# Altium PCB Single_channel_Mobo.PcbDoc
Units mm, origin at the board's own origin, x right, y up, seen from the top; angles counter-clockwise.
Board outline 82.3 x 56.04 mm, 4 copper layers (Component Side, Ground Plane, Power Plane, Solder Side), stack 1.704 mm thick; 45 components, 59 nets, 331 pads, 69 vias.
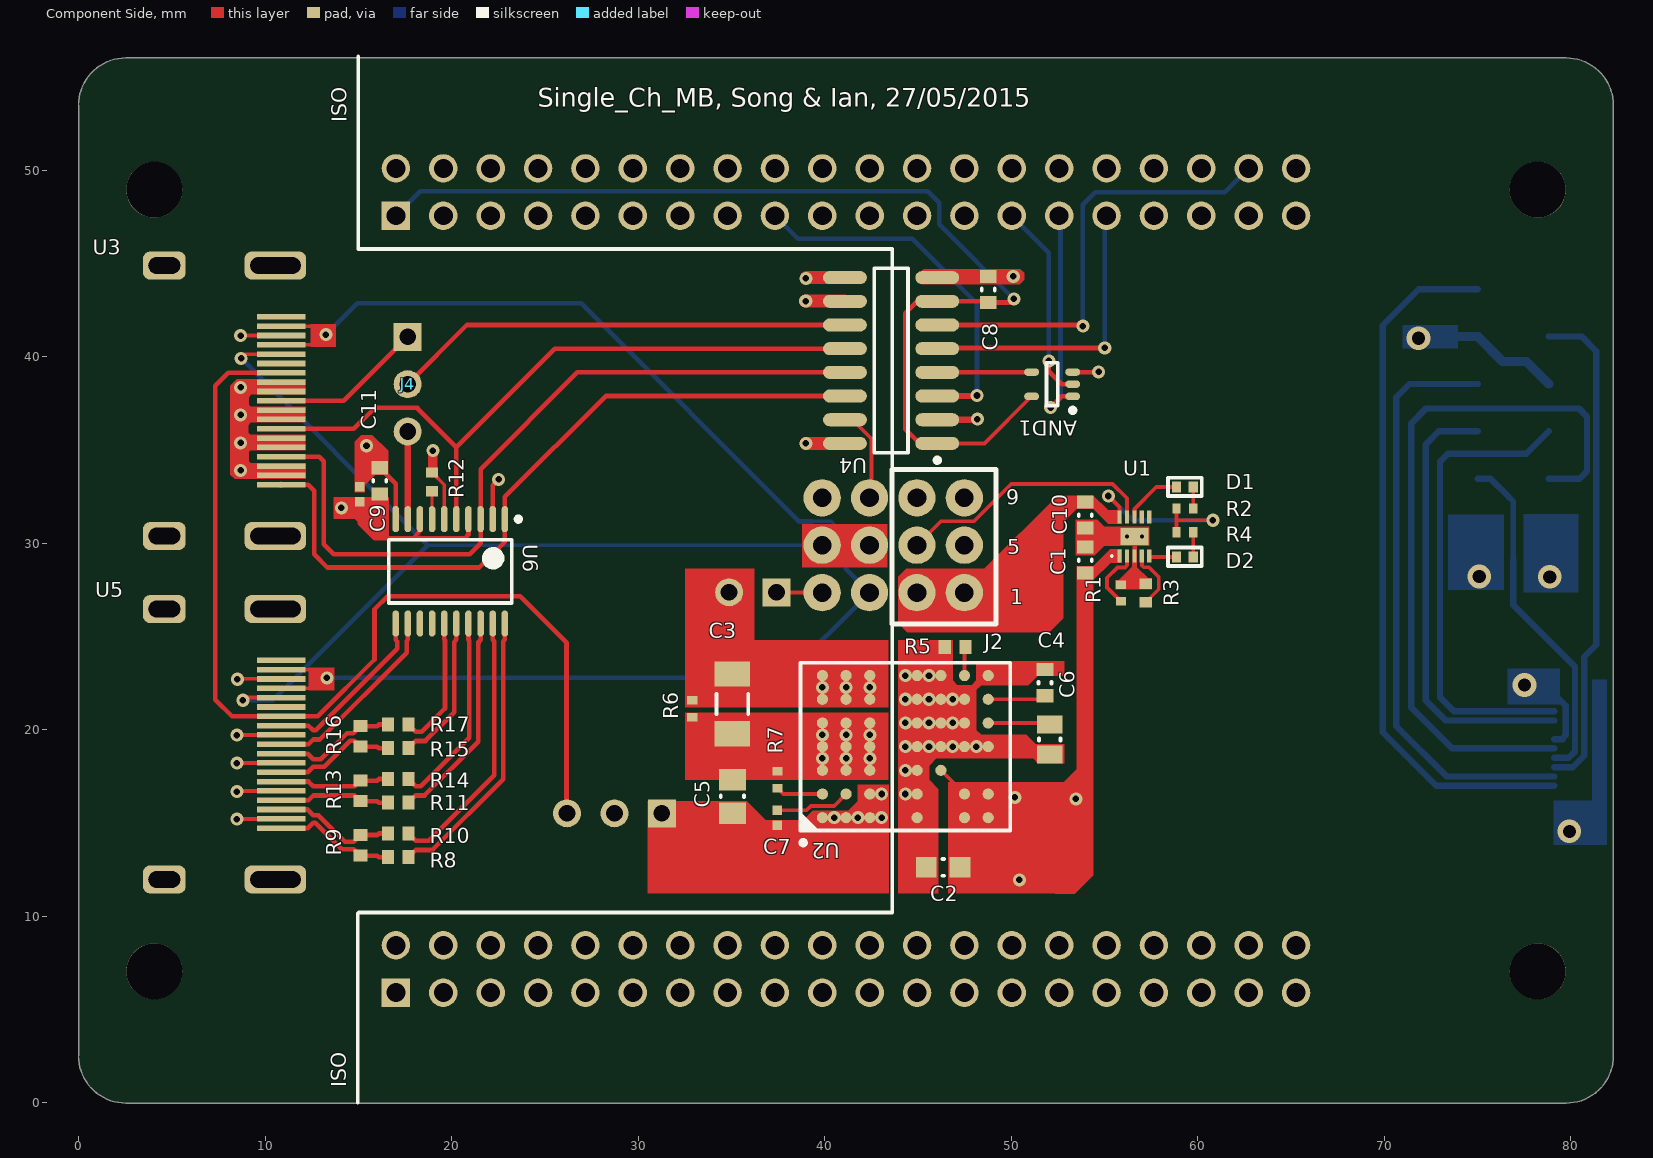
[diagram p0: Component Side view]
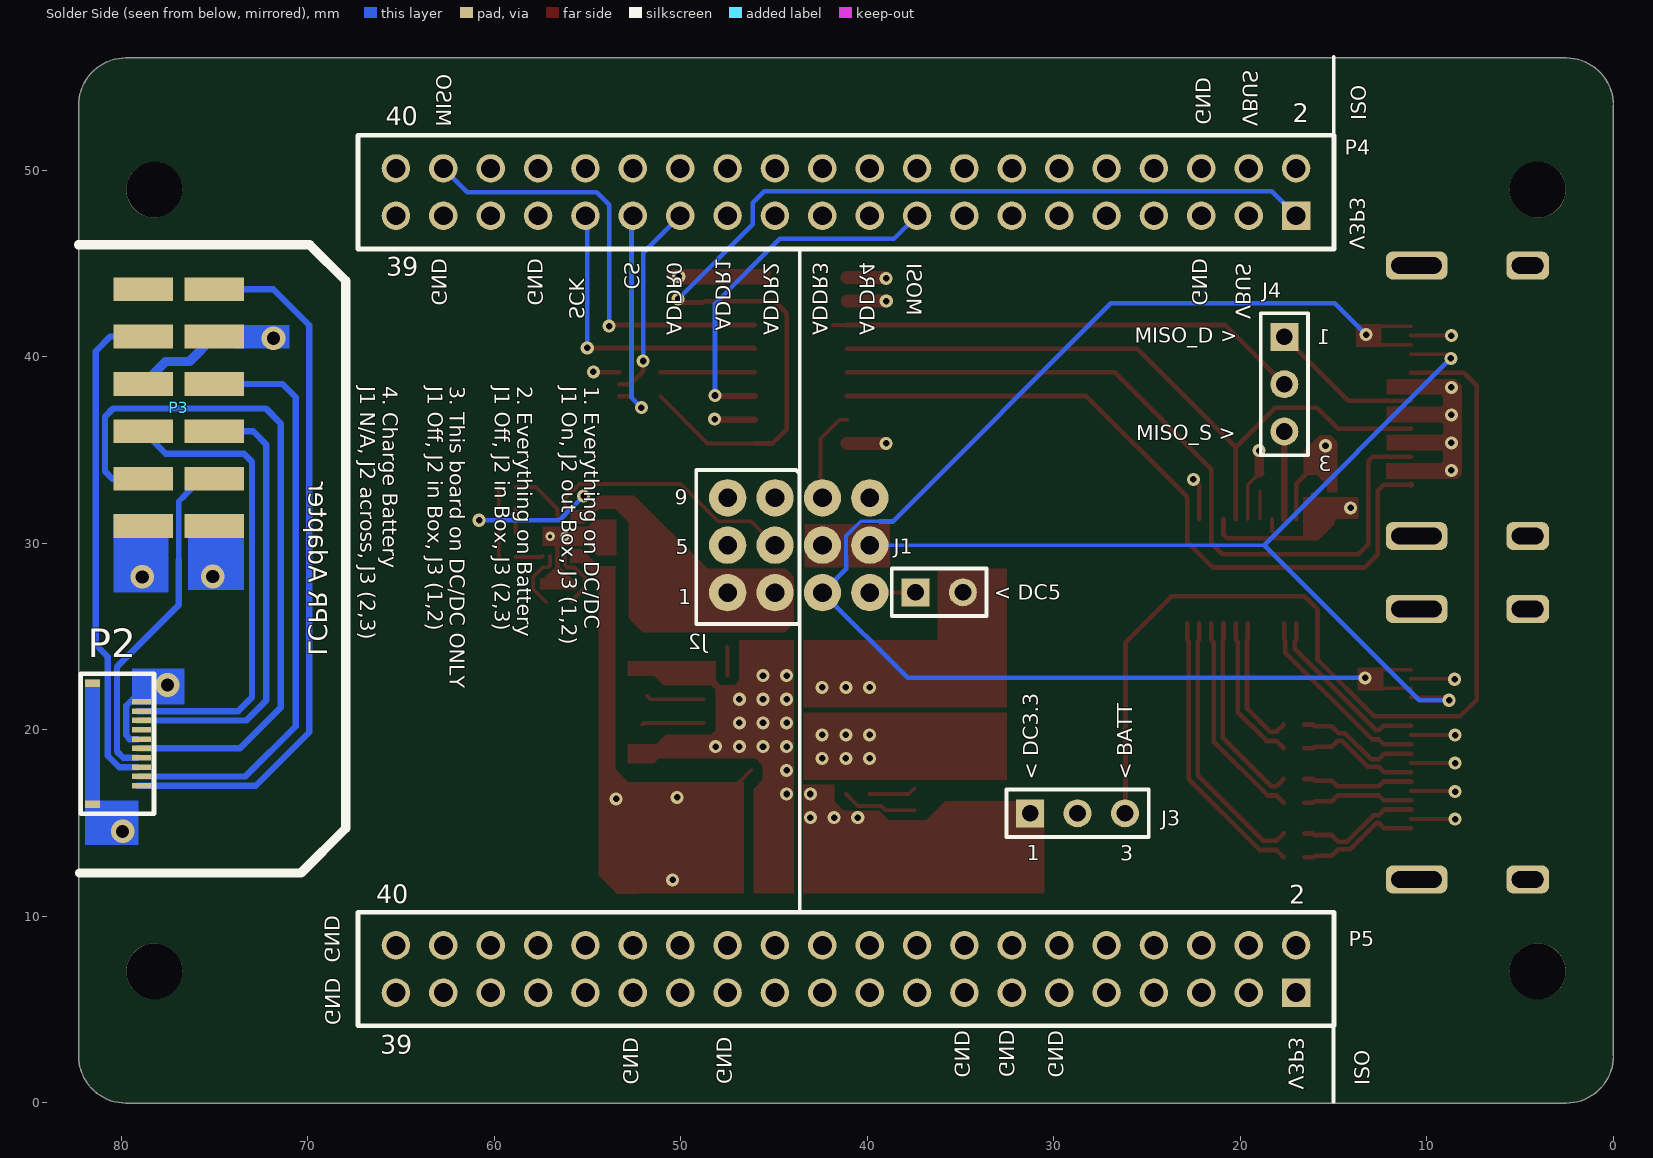
[diagram p1: Solder Side view, seen from below]
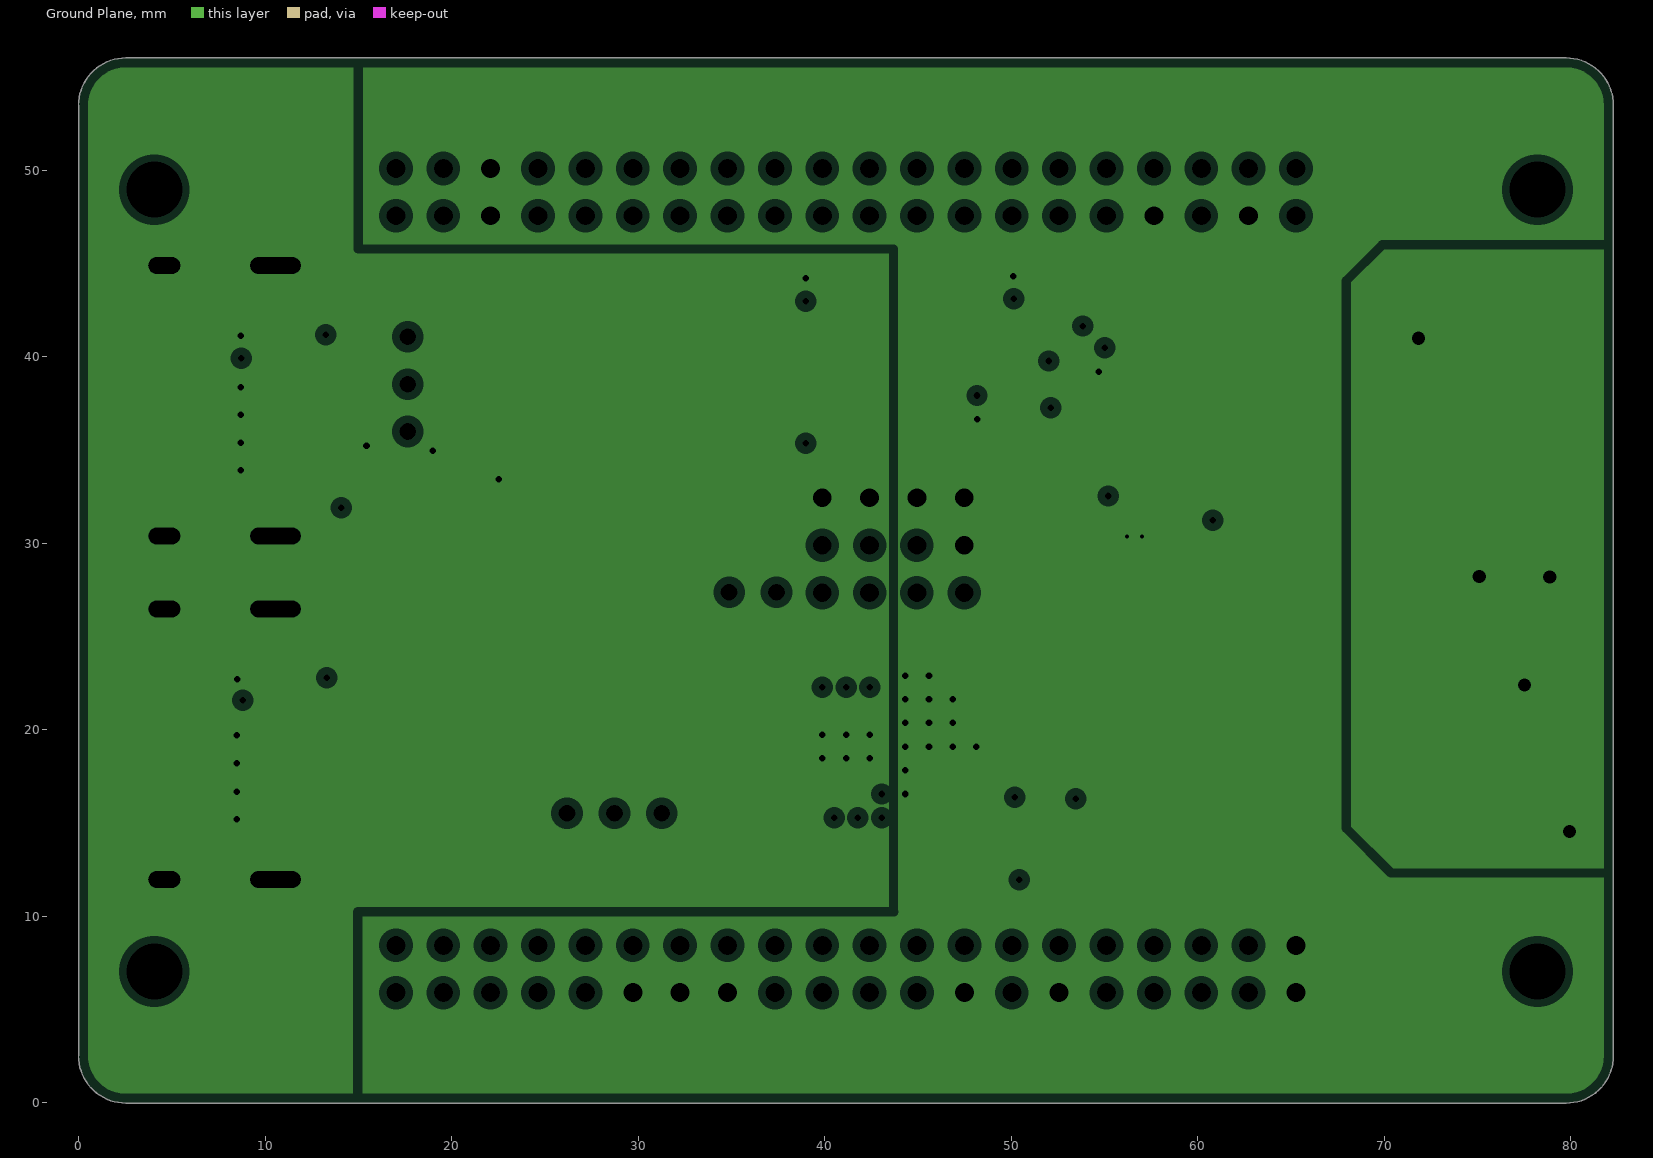
[diagram p2: Ground Plane, clearances drawn from the general rule]
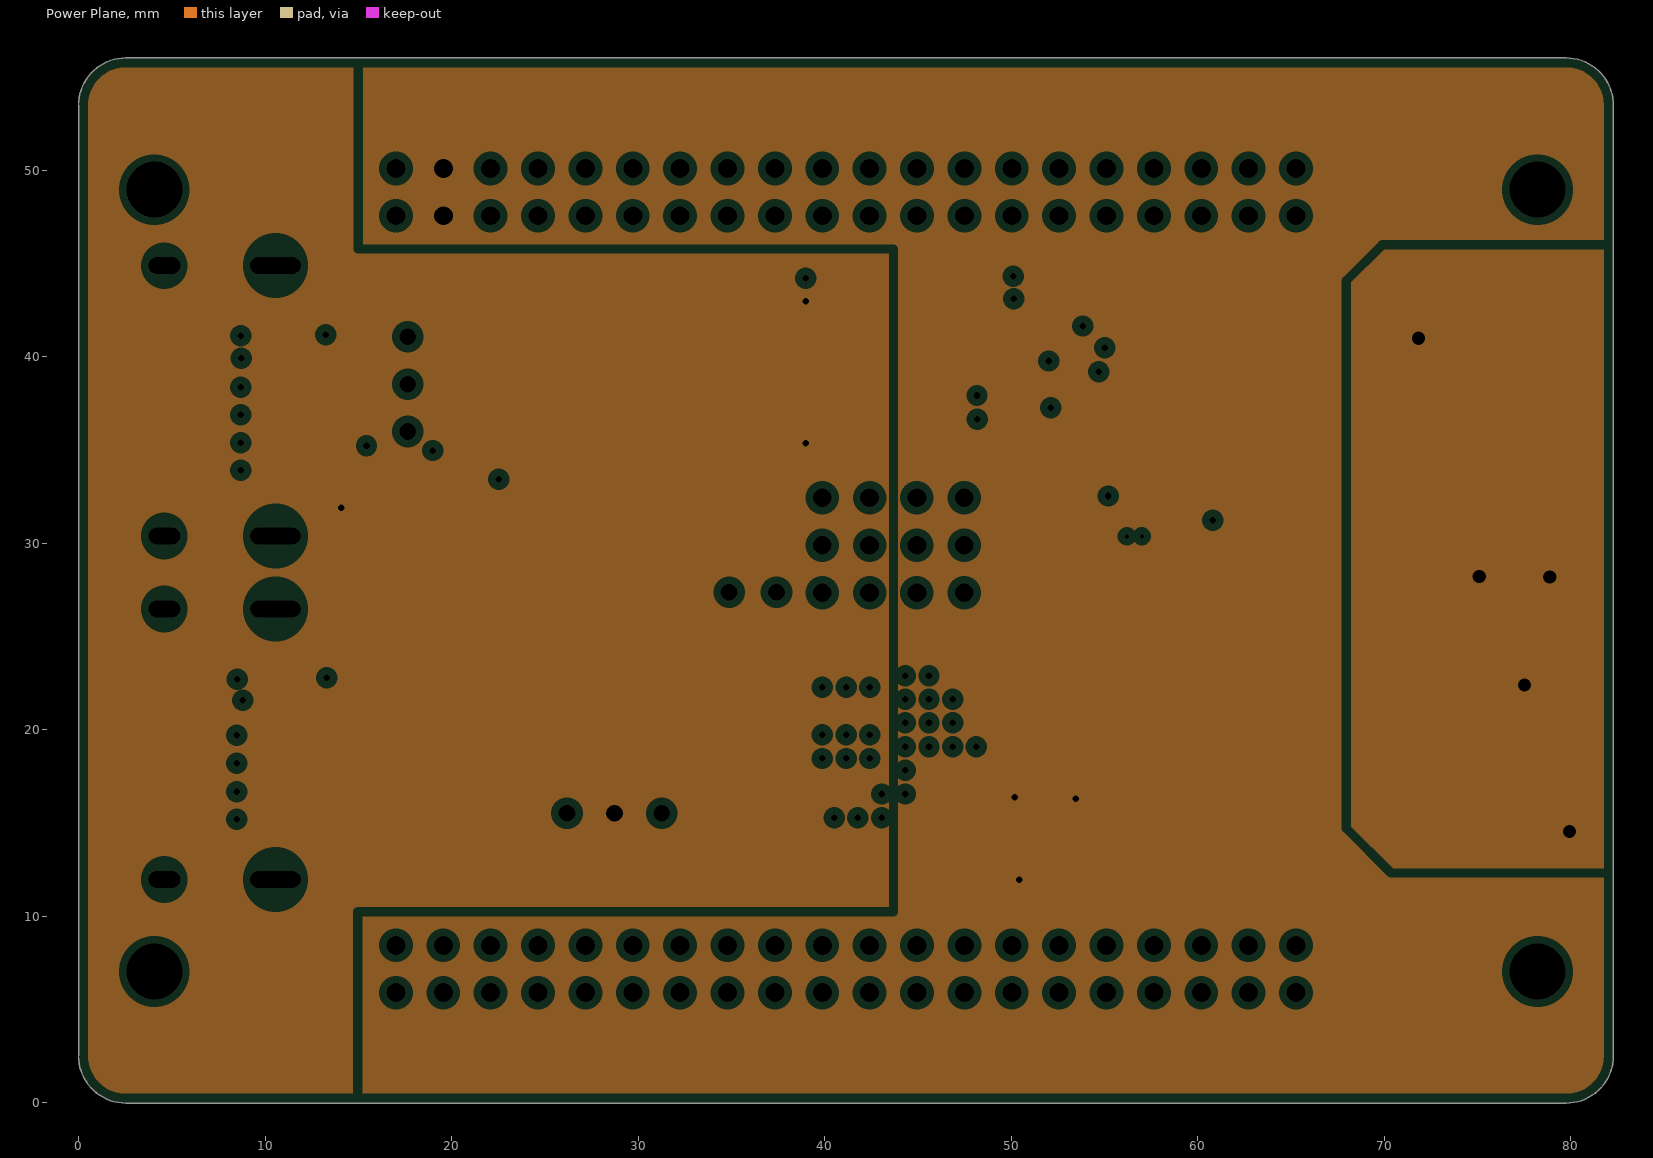
[diagram p3: Power Plane, clearances drawn from the general rule]

## Layer stack, top to bottom
Top Solder: solder mask 0.0102, Solder Resist, Dk 3.5
Component Side: signal copper 0.035
Dielectric 1: prepreg 0.2, PP7628, Dk 4.6
Ground Plane: plane copper 0.017, net (Multiple Nets)
Dielectric 3: core 1.2, KB-A, Dk 4.58
Power Plane: plane copper 0.017, net (Multiple Nets)
Dielectric 4: prepreg 0.2, PP7628, Dk 4.6
Solder Side: signal copper 0.035
Bottom Solder: solder mask 0.0102, Solder Resist, Dk 3.5

## Board outline
0,2.526 ccw(c2.54,2.526) 2.54,-0.014 79.756,-0.014 ccw(c79.756,2.526) 82.296,2.526 82.296,53.484 ccw(c79.756,53.484) 79.756,56.024 2.54,56.024 ccw(c2.54,53.484) 0,53.484

## Design rules (kind name [scope] priority, off if disabled: settings)
Clearance Clearance-xPP-xTP-xTT [All] p1: gap=0.15
ComponentClearance [All] p1: gap=0.25 collisioncheckmode=3 verticalgap=0.25 showdistances=FALSE
DiffPairsRouting DiffPair_LVDS_100DiffPairsRouting [InDifferentialPairClass('LVDS_100')] p1: maxlimit=0.762 minlimit=0.15 mostfreqgap=0.152 toplayer_minwidth=0.15 toplayer_maxwidth=0.6 toplayer_prefwidth=0.25 bottomlayer_minwidth=0.15 bottomlayer_maxwidth=0.6 bottomlayer_prefwidth=0.25 maxuncoupledlength=12.7
Height [All] p1: minheight=0 maxheight=25 prefheight=12.5
HoleSize HoleSize-PTH [All] p1: absolutevalues=TRUE maxlimit=6.3 minlimit=0.3 maxpercent=80.000 minpercent=20.000
HoleToHoleClearance [All] p1: gap=0.15 allowstackedmicrovias=TRUE
MatchedLengths DiffPair_LVDS_100MatchedLengths [InDifferentialPairClass('LVDS_100')] p1: tolerance=12 checknetsindiffpair=TRUE checkdiffpairvsdiffpair=FALSE checkothers=FALSE
MaxMinImpedance DiffPair_LVDS_100 [InDifferentialPairClass('LVDS_100')] p1: minimum=45.00 maximum=50.00
MinimumAnnularRing "Minimum IAR  >0.45mm" [((ObjectKind = 'Pad') OR (ObjectKind = 'Via')) And (Layer = 'MultiLayer') And (HoleDiameter > AsMM(0.45))] p1 off: minimumring=0.25 // minimum inner annular ring for pads > 0.45mm finished hole size
MinimumAnnularRing "Minimum IAR <=0.45mm" [((ObjectKind = 'Pad') OR (ObjectKind = 'Via')) And (Layer = 'MultiLayer') And (HoleDiameter <= AsMM(0.45))] p2: minimumring=0.125 // minimum inner annular ring for pads <= 0.45mm finished hole size
MinimumSolderMaskSliver [All] p1: minsoldermaskwidth=0.1
PlaneClearance PlaneClearance-IPI [All] p1: clearance=0.4
PlaneConnect [All] p1: planeconnectstyle=Relief reliefexpansion=0.4 reliefentries=4 reliefconductorwidth=0.2 reliefairgap=0.2
PolygonConnect [All vs IsNamedPolygon('VCC_1.5_L04_P002')] p1: connectstyle=Relief reliefconductorwidth=0.254 reliefentries=4 polygonreliefangle="90 Angle" airgapwidth=0.254
PolygonConnect PolygonConnect-xTW [All] p2: connectstyle=Relief reliefconductorwidth=0.2 reliefentries=4 polygonreliefangle="90 Angle" airgapwidth=0.254
RoutingCorners [All] p1: cornerstyle=45-Degree minsetback=2.5 maxsetback=2.5
RoutingVias [All] p1: holewidth=0.25 width=0.6 viastyle="Through Hole" minholewidth=0.35 minwidth=0.6 maxholewidth=0.5 maxwidth=1 // finishet hole size <= 0.45mm
SilkToSilkClearance [All] p1: silktosilkclearance=0.2
SilkToSolderMaskClearance SilkscreenOverComponentPads [IsPad] p1: minsilkscreentomaskgap=0.2 clearancetoexposedcopper=TRUE
SolderMaskExpansion [All] p1: expansion=0.1
Width DiffPair_LVDS_1 [InDifferentialPairClass('LVDS_100')] p1: maxlimit=0.262 minlimit=0.262 preferedwidth=0.262 impedancedriven=TRUE minimp=50.000000 maximp=50.000000 favimp=50.000000
Width SPI [InNetClass('SPI_SingleEnd')] p2: maxlimit=0.262 minlimit=0.019 preferedwidth=0.262 impedancedriven=TRUE minimp=50.000000 maximp=100.000000 favimp=50.000000
Width Width-xTW [All] p3: maxlimit=1.524 minlimit=0.15 preferedwidth=0.25
19 further rules are at their usual default settings.

## Classes and differential pairs
differential pair class LVDS_100: CLK CS I_CLK I_CS I_MOSI MISO MOSI
differential pair I_MOSI: +I_MOSI_P -I_MOSI_N
differential pair I_CS: +I_CS_P -I_CS_N
differential pair I_CLK: +I_CLK_P -I_CLK_N
differential pair CLK: +CLK_P -CLK_N
differential pair CS: +CS_P -CS_N
differential pair MISO: +MISO_P -MISO_N
differential pair MOSI: +MOSI_P -MOSI_N

## Components (designator, comment, footprint, x,y, rotation, side; value= is the part's Value field where it differs from the comment)
AND1 "AND_gate" "TSOP 5 AND" 52.203,38.53 r180 top
C1 "CAP 1uF 25V 0603(1608)" CAPC0603(1608)100_L 53.974,29.1 r270 top
C2 "CAP 2.2uF 25V 0603(1608)" CAPC0603(1608)100_M 46.361,12.622 r0 top
C3 "CAP 47uF 16V 1206(3216)" CAPC1206(3216)190_M 35.058,21.385 r90 top
C4 "CAP 1uF 25V 0603(1608)" CAPC0603(1608)100_L 51.822,22.528 r90 top
C5 "CAP 10uF 25V 0805(2012)" CAPC0805(2012)145_N 35.058,16.432 r270 top
C6 "CAP 4.7uF 25V 0805(2012)" CAPC0805(2012)145_L 52.076,19.48 r270 top
C7 "CAP 10nF 25V 0402(1005)" CAPC0402(1005)60_L 37.471,15.289 r90 top
C8 "CAP 1uF 25V 0603(1608)" CAPC0603(1608)100_L 48.774,43.61 r270 top
C9 "CAP 1uF 25V 0603(1608)" CAPC0603(1608)100_L 16.148,33.35 r270 top
C10 "CAP 1uF 25V 0603(1608)" CAPC0603(1608)100_L 53.974,31.513 r270 top
C11 "CAP 10nF 25V 0402(1005)" CAPC0402(1005)60_L 15.073,32.625 r270 top
D1 "LED2" "LED 0610" 59.317,33.012 r180 top
D2 "LED2" "LED 0610" 59.317,29.262 r180 top
J1 "Header 2" HDR1X2 37.423,27.375 r180 bottom
J2 "4x3 pin jumper header" "4x3 pin jumper header" 47.492,32.437 r180 top
J3 "Header 3" HDR1X3 31.273,15.525 r180 bottom
J4 "Header 3" HDR1X3 17.647,41.07 r270 top
P2 "10 pin FFC/FPC connector" "10 FFC/FPC connector 0.5mm pitch" 78.943,19.253 r270 bottom
P3 "12 pin dual row SMD header" TSM-106-01-S-DH 78.823,43.625 r90 bottom
P4 "Header 20X2" SSW-120-03-G-D 41.148,48.833 r180 bottom locked
P5 "Header 20X2" SSW-120-03-G-D 41.148,7.177 r180 bottom locked
R1 "5K6 5% 0402(1005)" RESC0402(1005)_L 55.892,27.337 r90 top
R2 "4K7 5% 0402(1005)" RESC0402(1005)_L 59.317,31.862 r180 top
R3 "2K 5% 0402(1005)" RESC0402(1005)_N 57.217,27.337 r90 top
R4 "4K7 5% 0402(1005)" RESC0402(1005)_L 59.317,30.587 r0 top
R5 "6K8 5% 0402(1005)" RESC0402(1005)_M 46.996,24.433 r180 top
R6 "1K 5% 0402(1005)" RESC0402(1005)_L 32.899,21.131 r90 top
R7 "300K 1% 0402(1005)" RESC0402(1005)_L 37.471,17.321 r90 top
R8 "165R 1% 0402(1005)" RESC0402(1005)_M 17.139,13.172 r0 top
R9 "140R 1% 0402(1005)" RESC0402(1005)_M 15.107,13.807 r270 top
R10 "165R 1% 0402(1005)" RESC0402(1005)_M 17.139,14.442 r0 top
R11 "165R 1% 0402(1005)" RESC0402(1005)_M 17.139,16.093 r0 top
R12 "10K 5% 0402(1005)" RESC0402(1005)_N 18.958,33.29 r270 top
R13 "140R 1% 0402(1005)" RESC0402(1005)_M 15.107,16.728 r270 top
R14 "165R 1% 0402(1005)" RESC0402(1005)_M 17.139,17.363 r0 top
R15 "165R 1% 0402(1005)" RESC0402(1005)_M 17.139,19.014 r0 top
R16 "140R 1% 0402(1005)" RESC0402(1005)_M 15.107,19.649 r270 top
R17 "165R 1% 0402(1005)" RESC0402(1005)_M 17.139,20.284 r0 top
U1 "BQ24040DSQT" DSQ10-1500X900TP 56.613,30.37 r90 top
U2 "LTM8048EY#PBF" LT-BGA-45-11250X9000X4920 44.329,19.099 r90 top
U3 "MOLEX 0471510001" "MOLEX 0471510001" 1.01,37.641 r270 top
U4 "Si8641BC-B-IS1" SLAB-SOIC-16-NB_M 43.567,39.8 r180 top
U5 "MOLEX 0471510001" "MOLEX 0471510001" 1.01,19.226 r270 top
U6 "SN65LVDT41QPWREP" PW20_L 19.933,28.497 r270 top

## Footprints (in the part's own frame and the unit in brackets; to place one, negate y for a bottom-side part, rotate by r counter-clockwise, add the part's x,y. Pads: shape width x height; smd on the part's side, far side on the other; paste and mask are expansions set on the pad)
"4x3 pin jumper header" [mm]
  round 2 hole 1: 1(0,5.08) 2(2.54,5.08) 3(5.08,5.08) 4(7.62,5.08) 5(0,2.54) 6(2.54,2.54) 7(5.08,2.54) 8(7.62,2.54) 9(0,0) 10(2.54,0) 11(5.08,0) 12(7.62,0)
  silkscreen extent -1.7,-1.52 3.88,6.76
"10 FFC/FPC connector 0.5mm pitch" [mm] "HIROSE(HRS)  FH34SRJ-10S-0.5SH(50)  CONNECTOR, FFC/FPC, RCPT, 10POS, 1ROW"
  rect 0.4x0.8 smd: 0(-3.25,-2.6) 0(3.25,-2.6)
  rect 0.3x1 smd: 1(2.25,0.02) 2(1.75,0.02) 3(1.25,0.02) 4(0.75,0.02) 5(0.25,0.02) 6(-0.25,0.02) 7(-0.75,0.02) 8(-1.25,0.02) 9(-1.75,0.02) 10(-2.25,0.02)
  silkscreen extent -3.75,-3.23 3.75,0.69
CAPC0402(1005)60_L [mm] "Chip Capacitor, Body 1.0x0.5mm, Height 0.6mm, IPC High Density"
  rect 0.52x0.52 smd: 1(-0.4,0) 2(0.4,0)
  body extent -0.55,-0.3 0.55,0.3, height 0.6
CAPC0603(1608)100_L [mm] "Chip Capacitor, Body 1.6x0.8mm, Height 1.0mm, IPC High Density"
  rect 0.7x0.9 smd: 1(-0.7,0) 2(0.7,0)
  silkscreen extent -0.05,-0.35 0.05,0.35, body extent -0.87,-0.47 0.88,0.48, height 1
CAPC0603(1608)100_M [mm] "Chip Capacitor, Body 1.6x0.8mm, Height 1.0mm, IPC Low Density"
  rect 1.1x1.1 smd: 1(-0.9,0) 2(0.9,0)
  silkscreen extent -0.05,-0.45 0.05,0.45, body extent -0.87,-0.47 0.88,0.48, height 1
CAPC0805(2012)145_L [mm] "Chip Capacitor, Body 2.0x1.2mm, Height 1.45mm, IPC High Density"
  rect 0.95x1.35 smd: 1(-0.8,0) 2(0.8,0)
  silkscreen extent -0.05,-0.58 0.05,0.58, body extent -1.1,-0.72 1.1,0.72, height 1.45
CAPC0805(2012)145_N [mm] "Chip Capacitor, Body 2.0x1.2mm, Height 1.45mm, IPC Medium Density"
  rect 1.15x1.45 smd: 1(-0.9,0) 2(0.9,0)
  silkscreen extent -0.05,-0.62 0.05,0.63, body extent -1.1,-0.72 1.1,0.73, height 1.45
CAPC1206(3216)190_M [mm] "Chip Capacitor, Body 3.2x1.6mm, Height 1.9mm, IPC Low Density"
  rect 1.35x1.9 smd: 1(-1.6,0) 2(1.6,0)
  silkscreen extent -0.55,-0.85 0.55,0.85, body extent -1.7,-0.9 1.7,0.9, height 1.9
DSQ10-1500X900TP [mm] "SON, 10-Leads, Body 2x2mm, Pitch 0.4mm, Thermal Pad 1.5x0.9mm, TI Recommended"
  rect 0.7x0.23 smd paste-0.115 mask+0.05: 1(-1.05,0.8) 2(-1.05,0.4) 3(-1.05,0) 4(-1.05,-0.4) 5(-1.05,-0.8) 6(1.05,-0.8) 7(1.05,-0.4) 8(1.05,0) 9(1.05,0.4) 10(1.05,0.8)
  rect 0.9x1.5 smd paste-0.45 mask+0.05: 11(0,0)
  silkscreen extent -1.1,1.16 -1,1.26, body extent -1.05,-1.05 1.05,1.05, height 0.8
HDR1X2 [mm] "Connector; Header; 2 Position"
  rect 1.5x1.5 hole 0.9: 1(0,0)
  round 1.5 hole 0.9: 2(2.54,0)
  silkscreen extent -1.27,-1.27 3.81,1.27
HDR1X3 [mm] "Connector; Header; 3 Position"
  rect 1.5x1.5 hole 0.9: 1(0,0)
  round 1.5 hole 0.9: 2(2.54,0) 3(5.08,0)
  silkscreen extent -1.27,-1.27 6.35,1.27
"LED 0610" [mm]
  rect 0.5x0.6 smd: 1(-0.45,0) 2(0.45,0)
  silkscreen extent -0.91,-0.51 0.91,0.48, body extent -0.8,-0.41 0.81,0.38, height 0.2
LT-BGA-45-11250X9000X4920 [mm] "BGA, 45-Balls, Body 11.25x9mm, Pitch 1.27mm"
  round 0.6 smd: A1(-3.81,4.445) A2(-2.54,4.445) A3(-1.27,4.445) A4(0,4.445) A5(1.27,4.445) A6(2.54,4.445) A7(3.81,4.445) B1(-3.81,3.175) B2(-2.54,3.175) B3(-1.27,3.175) B4(0,3.175) B5(1.27,3.175) B6(2.54,3.175) B7(3.81,3.175) C1(-3.81,1.905) C2(-2.54,1.905) C3(-1.27,1.905) C4(0,1.905) C5(1.27,1.905) C6(2.54,1.905) C7(3.81,1.905) E1(-3.81,-0.635) E2(-2.54,-0.635) E3(-1.27,-0.635) E4(0,-0.635) E5(1.27,-0.635) E6(2.54,-0.635) E7(3.81,-0.635) F3(-1.27,-1.905) F4(0,-1.905) F5(1.27,-1.905) F6(2.54,-1.905) F7(3.81,-1.905) G1(-3.81,-3.175) G2(-2.54,-3.175) G4(0,-3.175) G5(1.27,-3.175) G6(2.54,-3.175) G7(3.81,-3.175) H1(-3.81,-4.445) H2(-2.54,-4.445) H4(0,-4.445) H5(1.27,-4.445) H6(2.54,-4.445) H7(3.81,-4.445)
  silkscreen extent -5.27,-5.63 4.5,5.63, body extent -4.5,-5.63 4.5,5.63, height 5.12
"MOLEX 0471510001" [mm] "HDMI connector"
  rect 0.3x2.6 smd: 1(4.5,9.85) 2(4,9.85) 3(3.5,9.85) 4(3,9.85) 5(2.5,9.85) 6(2,9.85) 7(1.5,9.85) 8(1,9.85) 9(0.5,9.85) 10(0,9.85) 11(-0.5,9.85) 12(-1,9.85) 13(-1.5,9.85) 14(-2,9.85) 15(-2.5,9.85) 16(-3,9.85) 17(-3.5,9.85) 18(-4,9.85) 19(-4.5,9.85)
  rrect50% 1.5x3.3 hole 0.9 slot 2.7 at 90 deg: gnd(-7.25,9.55) gnd(7.25,9.55)
  rrect50% 1.5x2.3 hole 0.9 slot 1.7 at 90 deg: gnd(-7.25,3.59) gnd(7.25,3.59)
  body extent -7.5,-1 7.5,11.15, height 6.28
PW20_L [mm] "TSOP, 20-Leads, Body 6.5x4.4mm, Pitch 0.65mm, IPC High Density"
  oval 1.4x0.35 smd: 1(-2.8,2.925) 2(-2.8,2.275) 3(-2.8,1.625) 4(-2.8,0.975) 5(-2.8,0.325) 6(-2.8,-0.325) 7(-2.8,-0.975) 8(-2.8,-1.625) 9(-2.8,-2.275) 10(-2.8,-2.925) 11(2.8,-2.925) 12(2.8,-2.275) 13(2.8,-1.625) 14(2.8,-0.975) 15(2.8,-0.325) 16(2.8,0.325) 17(2.8,0.975) 18(2.8,1.625) 19(2.8,2.275) 20(2.8,2.925)
  silkscreen extent -2.92,-3.3 1.7,3.78, body extent -2.25,-3.3 2.25,3.3, height 1.2
RESC0402(1005)_L [mm] "Chip Resistor, Body 1.0x0.5mm, IPC High Density"
  rect 0.45x0.55 smd: 1(-0.45,0) 2(0.45,0)
  body extent -0.52,-0.27 0.53,0.28, height 0.4
RESC0402(1005)_M [mm] "Chip Resistor, Body 1.0x0.5mm, IPC Low Density"
  rect 0.65x0.75 smd: 1(-0.55,0) 2(0.55,0)
  body extent -0.52,-0.28 0.53,0.28, height 0.4
RESC0402(1005)_N [mm] "Chip Resistor, Body 1.0x0.5mm, IPC Medium Density"
  rect 0.55x0.65 smd: 1(-0.5,0) 2(0.5,0)
  body extent -0.52,-0.27 0.53,0.28, height 0.4
SLAB-SOIC-16-NB_M [mm] "SOIC, 16-Leads, Body 9.9x3.9mm, Pitch 1.27mm, IPC Low Density"
  oval 2.35x0.7 smd: 1(-2.475,4.445) 2(-2.475,3.175) 3(-2.475,1.905) 4(-2.475,0.635) 5(-2.475,-0.635) 6(-2.475,-1.905) 7(-2.475,-3.175) 8(-2.475,-4.445) 9(2.475,-4.445) 10(2.475,-3.175) 11(2.475,-1.905) 12(2.475,-0.635) 13(2.475,0.635) 14(2.475,1.905) 15(2.475,3.175) 16(2.475,4.445)
  silkscreen extent -2.6,-4.95 0.9,5.47, body extent -1.95,-4.95 1.95,4.95, height 1.75
SSW-120-03-G-D [mil] "SSW-120-03-G-D"
  rect 60x60 hole 40: 1(950,-50)
  round 60 hole 40: 2(950,50) 3(850,-50) 4(850,50) 5(750,-50) 6(750,50) 7(650,-50) 8(650,50) 9(550,-50) 10(550,50) 11(450,-50) 12(450,50) 13(350,-50) 14(350,50) 15(250,-50) 16(250,50) 17(150,-50) 18(150,50) 19(50,-50) 20(50,50) 21(-50,-50) 22(-50,50) 23(-150,-50) 24(-150,50) 25(-250,-50) 26(-250,50) 27(-350,-50) 28(-350,50) 29(-450,-50) 30(-450,50) 31(-550,-50) 32(-550,50) 33(-650,-50) 34(-650,50) 35(-750,-50) 36(-750,50) 37(-850,-50) 38(-850,50) 39(-950,-50) 40(-950,50)
  silkscreen extent -1030,-120 1101,120
TSM-106-01-S-DH [mm] "12 pin surface mount right angle header"
  rect 1.27x3.18 smd: 1(0,0) 2(0,-3.81) 3(-2.54,0) 4(-2.54,-3.81) 5(-5.08,0) 6(-5.08,-3.81) 7(-7.62,0) 8(-7.62,-3.81) 9(-10.16,0) 10(-10.16,-3.81) 11(-12.7,0) 12(-12.7,-3.81)
  body extent -13.9,-5.04 1.34,11.22, height 6.05
"TSOP 5 AND" [mm] "AND gate 74LVCIG08GW"
  oval 0.8x0.4 smd: 1(-1.1,0.65) 2(-1.1,0) 3(-1.1,-0.65) 4(1.1,-0.65) 5(1.1,0.65)
  silkscreen extent -1.23,-1.15 0.3,1.52, body extent -0.7,-1.15 0.7,1.15, height 1.1

## Part data
C1 C4 C8 C9 C10: library part CMP-1035-02740-1, "CAP 1uF 25V ±10% 0603 (1608 Metric) Thickness 1mm SMD"
C2: library part CMP-1035-02767-1, "CAP 2.2uF 25V ±10% 0603 (1608 Metric) Thickness 1mm SMD"
C3: library part CMP-1037-05003-1, "CAP 47uF 16V ±20% 1206 (3216 Metric) Thickness 1.9mm SMD"
C5: library part CMP-1036-04932-1, "CAP 10uF 25V ±10% 0805 (2012 Metric) Thickness 1.45mm SMD"
C6: library part CMP-1036-04895-1, "CAP 4.7uF 25V ±10% 0805 (2012 Metric) Thickness 1.45mm SMD"
C7 C11: library part CMP-1034-01879-1, "CAP 10nF 25V ±5% 0402 (1005 Metric) Thickness 0.6mm SMD"
D1 D2: "Typical RED, GREEN, YELLOW, AMBER GaAs LED"
J1: "Header, 2-Pin"
J3 J4: "Header, 3-Pin"
P3: "header"
P4 P5: "Header, 20-Pin, Dual row"
R1: library part CMP-1011-00092-1, "5K6 0.063W 5% 0402 (1005 Metric)  SMD"
R2 R4: library part CMP-1011-00090-1, "4K7 0.063W 5% 0402 (1005 Metric)  SMD"
R3: library part CMP-1011-00081-1, "2K 0.063W 5% 0402 (1005 Metric)  SMD"
R5: library part CMP-1011-00094-1, "6K8 0.063W 5% 0402 (1005 Metric)  SMD"
R6: library part CMP-1011-00074-1, "1K 0.063W 5% 0402 (1005 Metric)  SMD"
R7: library part CMP-1011-00788-1, "300K 0.063W 1% 0402 (1005 Metric)  SMD"
R8 R10 R11 R14 R15 R17: library part CMP-1011-00420-1, "165R 0.063W 1% 0402 (1005 Metric)  SMD"
R9 R13 R16: library part CMP-1011-00412-1, "140R 0.063W 1% 0402 (1005 Metric)  SMD"
R12: library part CMP-1011-00098-1, "10K 0.063W 5% 0402 (1005 Metric)  SMD"
U1: library part CMP-0321-00457-1, "800 mA, Single-Input, Single Cell Li-Ion Battery Charger with Auto Start. Vovp=6.6 V, 3.5 V, -40 to 85 degC, 10-pin SON (DSQ), Green (RoHS & no Sb/Br)"
U2: library part CMP-0483-00034-1, "3.1 VIN to 32 VIN Isolated uModule DC/DC Converter with LDO Post Regulator, 45-pin BGA, -40 to 125 degC, Pb-Free, Tray"
U3 U5: "MOLEX 0471510001 hdmi connector"
U4: library part CMP-0512-00190-1, "Low-Power Quad-Channel Digital Isolator, 150 Mbps, 3.75 kVRMS Isolation Rating, -40 to 125 degC, 16-pin SOIC"
U6: library part CMP-0327-00207-1, "Enhanced Product Memorystick? Interconnect Extender Chipset, -40 to +125 degC, 20-Pin TSSOP (PW), Green (RoHS & no Sb/Br)"

## Free pads (board coordinates)
  round 2.997 hole 2.997: ""(4.064,7.05) ""(4.064,48.96) ""(78.232,7.05) ""(78.232,48.96)

## Via types
v1: diameter 0.7, hole 0.35, Component Side to Solder Side, 62 vias
v2: diameter 1.27, hole 0.711, Component Side to Solder Side, 5 vias
v3: diameter 0.5, hole 0.2, Component Side to Solder Side, 2 vias

## Nets (pads, with @x,y where several pads share a name; then routed paths per layer and width w, separated by ;. In a path a pad name is that pad's centre, name@x,y a point inside that pad or via, vN(x,y) a via of type N, cw(c..) or ccw(c..) an arc to the next point about the centre after c; other vN are vias at no path point)
/CS: AND1.1 P4.29 | length 12
  Component Side w0.25: v1(52.123,37.275) 52.728,37.88 AND1.1
  Solder Side w0.25: v1(52.123,37.275) 52.648,37.8 52.648,47.493 P4.29
ADDRESS_B0: AND1.2 P4.27 | length 10.7
  Component Side w0.25: v1(52.023,39.775) 52.023,39.225 52.718,38.53 AND1.2
  Solder Side w0.25: P4.27 52.023,45.578 v1(52.023,39.775)
BATT_TH: J2.7 J2.8 U3.15 U5.15 | length 53
  Component Side w0.203: v1(8.717,39.912) 8.946,40.141 U3.15 ; v1(8.817,21.587) 8.956,21.726 U5.15
  Solder Side w0.203: 18.732,29.897 37.123,29.897 J2.8
  Solder Side w0.25: v1(8.717,39.912) 18.732,29.897 10.422,21.587 v1(8.817,21.587)
CLK: P4.31 U4.5 | length 16.1
  Component Side w0.25: U4.5 46.082,40.475 v1(55.023,40.475)
  Solder Side w0.25: v1(55.023,40.475) 55.023,47.468 P4.31
CLK_N: R16.1 R17.1 U5.9 | length 6.6
  Component Side w0.25: U5.9 12.285,18.726 12.584,18.427 12.998,18.427 14.396,19.825 14.733,19.825 R16.1 16.009,20.199 16.094,20.284 R17.1
CLK_P: R15.1 R16.2 U5.7 | length 6.6
  Component Side w0.25: U5.7 12.285,17.726 12.584,18.025 13.165,18.025 14.563,19.423 14.783,19.423 R16.2 16.009,19.099 16.094,19.014 R15.1
CLK_S: U3.7 U4.12 U6.5 | length 37.6
  Component Side w0.25: U3.7 14.764,36.141 15.898,37.275 18.173,37.275 18.173,37.245 20.258,35.16 ; U6.5 20.258,35.16 ; U4.12 25.533,40.435 20.258,35.16
CS_N: R13.1 R14.1 U5.6 | length 6
  Component Side w0.25: U5.6 12.33,17.226 12.584,16.972 14.801,16.972 R13.1 16.009,17.278 16.094,17.363 R14.1
CS_P: R11.1 R13.2 U5.4 | length 6
  Component Side w0.25: U5.4 12.33,16.226 12.584,16.48 14.805,16.48 R13.2 16.009,16.178 16.094,16.093 R11.1
CS_S: U3.4 U4.13 U6.3 | length 41.4
  Component Side w0.25: U3.4 12.907,34.641 13.157,34.391 13.157,29.941 13.685,29.413 20.974,29.413 21.558,29.997 U6.3 21.558,33.979 26.744,39.165 U4.13
GND: AND1.3 C1.1 C2.1 C4.2 C6.2 C8.1 C10.2 J2.5 J2.9 J2.10 P4.5 P4.6 P4.33 P4.37 P5.11 P5.13 P5.15 P5.25 P5.29 P5.39 P5.40 R1.2 R3.2 R5.2 U1.3 U1.11 U2.E1 U2.E2 U2.E3 U2.E4 U2.E5 U2.E6 U2.E7 U2.F4 U2.F5 U2.F6 U2.F7 U2.G4 U2.G5 U2.G6 U2.H4 U2.H7 U4.2 U4.8 | length 7.7
  Component Side w0.203: v1@54.685,39.18 v1(54.692,39.187)
  Component Side w0.25: U4.8 46.107,44.31 C8.1 48.776,44.312 v1(50.117,44.312) ; AND1.3 v1@54.685,39.18
  Component Side w0.34: U4.2 48.155,36.625 v1(48.192,36.662)
  other v1: 44.329,16.559 44.329,17.829 44.329,19.099 45.599,19.099 46.869,19.099 48.139,19.099 44.329,20.369 45.599,20.369 46.869,20.369 44.329,21.639 45.599,21.639 46.869,21.639 44.329,22.909 45.599,22.909
  other v3: 56.213,30.37 57.013,30.37
I_CLK_N: R17.2 U6.15 | length 7.2
  Component Side w0.25: R17.2 18.078,19.895 18.398,19.895 19.647,21.144 19.647,24.787 19.608,24.827 U6.15
I_CLK_P: R15.2 U6.16 | length 8.1
  Component Side w0.25: R15.2 18.078,19.403 18.602,19.403 20.139,20.941 20.139,24.708 20.258,24.827 U6.16
I_CS_N: R14.2 U6.17 | length 10.6
  Component Side w0.25: R14.2 18.078,16.974 18.348,16.974 20.947,19.573 20.947,24.787 20.908,24.827 U6.17
I_CS_P: R11.2 U6.18 | length 11.5
  Component Side w0.25: R11.2 18.078,16.482 18.552,16.482 21.439,19.37 21.439,24.708 21.479,24.748 ; 21.479,24.7 21.479,24.748 ; U6.18 21.558,24.827 21.479,24.748
I_MOSI_N: R10.2 U6.19 | length 14.4
  Component Side w0.25: R10.2 18.081,14.05 18.773,14.05 22.287,17.564 22.287,24.748 22.208,24.827 U6.19
I_MOSI_P: R8.2 U6.20 | length 15.2
  Component Side w0.25: R8.2 18.075,13.558 18.977,13.558 22.779,17.36 22.779,24.748 22.858,24.827 U6.20
IGND: C3.1 C5.1 C9.1 C11.1 J2.11 J2.12 R6.1 R7.2 R12.1 U2.A3 U2.A4 U2.A5 U2.B3 U2.B4 U2.B5 U2.C3 U2.C4 U2.C5 U3.2 U3.3 U3.5 U3.6 U3.8 U3.9 U3.11 U3.12 U3.17 U3.gnd U4.9 U4.15 U5.2 U5.5 U5.8 U5.11 U5.17 U5.gnd U6.2 U6.6 U6.10 | length 32.1
  Component Side w0.15: C11.1 15.123,33.025 C9.1 16.148,34.525 v1(15.441,35.232)
  Component Side w0.203: v1(8.692,41.137) 8.696,41.141 U3.17 ; v1@8.742,15.237 8.753,15.226 U5.2 ; v1@8.742,16.712 8.756,16.726 U5.5 ; v1@8.742,18.237 8.753,18.226 U5.8 ; v1@8.742,19.737 8.753,19.726 U5.11 ; v1@8.767,22.737 10.849,22.737 U5.17 ; R12.1 19.608,33.14 U6.6 ; v1(38.998,44.2) v1@39.043,44.245 ; U4.15 41.498,36.625 42.519,35.604 J2.11@42.519,32.544
  Component Side w0.25: C9.1 17.008,33.19 U6.10 ; U6.2 22.208,33.105 v1(22.53,33.426)
  Component Side w0.51: R12.1 18.998,33.83 v1(18.998,34.975)
  Component Side w0.7: v1@39.043,44.245 U4.9
  other v1: 8.492,15.212 8.492,16.687 8.492,18.212 39.884,18.464 41.154,18.464 42.424,18.464 8.492,19.712 39.884,19.734 41.154,19.734 42.424,19.734 8.517,22.712 8.692,33.912 8.692,35.387 8.692,36.887 8.692,38.362
MISO: P4.38 U4.6 | length 24
  Component Side w0.25: U4.6 v1@53.793,41.705
  Component Side w0.51: v1@53.793,41.705 v1(53.848,41.65)
  Solder Side w0.25: v1(53.848,41.65) 53.848,48.15 54.523,48.825 61.46,48.825 P4.38
MISO_D: J4.3 U6.9 | length 4.7
  Component Side w0.203: U6.9@17.647,31.308 U6.9
  Component Side w0.34: J4.3 17.658,35.979 U6.9
MISO_N: U5.12 U6.11 | length 9.5
  Component Side w0.25: U5.12 12.33,20.226 12.584,19.972 12.723,19.972 17.098,24.347 17.098,24.737 17.008,24.827 U6.11
MISO_P: U5.10 U6.12 | length 10.3
  Component Side w0.25: U5.10 12.33,19.226 12.584,19.48 12.927,19.48 17.59,24.143 17.59,24.759 17.658,24.827 U6.12
MISO_S: J4.1 U3.10 | length 8.2
  Component Side w0.25: U3.10 14.218,37.641 J4.1
MOSI: P4.17 U4.3 | length 19.9
  Component Side w0.15: v1@48.143,37.895 v1(48.173,37.925)
  Component Side w0.34: U4.3 v1@48.143,37.895
  Solder Side w0.25: P4.17 38.576,46.325 44.698,46.325 48.173,42.85 v1(48.173,37.925)
MOSI_N: R9.1 R10.1 U5.3 | length 6.6
  Component Side w0.25: U5.3 12.285,15.726 12.584,15.427 12.865,15.427 14.29,14.002 14.752,14.002 R9.1 16.009,14.357 16.094,14.442 R10.1
MOSI_P: R8.1 R9.2 U5.1 | length 6.6
  Component Side w0.25: U5.1 12.285,14.726 12.584,15.025 12.698,15.025 14.123,13.6 14.764,13.6 R9.2 16.009,13.257 16.094,13.172 R8.1
MOSI_S: U3.1 U4.14 U6.1 | length 39.3
  Component Side w0.25: U3.1 12.323,33.141 12.639,32.825 12.639,29.409 13.346,28.702 21.488,28.702 22.858,30.072 U6.1 22.858,32.485 28.268,37.895 U4.14
NetAND1_4: AND1.4 U4.4 | length 5.1
  Component Side w0.25: U4.4 46.057,39.18 AND1.4
NetC4_1: C4.1 U2.H6 | length 3.1
  Component Side w0.203: U2.H6 51.633,21.639 C4.1
NetC6_1: C6.1 U2.H5 | length 3.3
  Component Side w0.203: U2.H5 51.987,20.369 C6.1
NetC7_2: C7.2 U2.B2 | length 4
  Component Side w0.203: C7.2 39.039,15.689 39.272,15.922 40.517,15.922 U2.B2
NetC10_1: C10.1 J2.1 J2.2 R2.2 R4.1 U1.10 | length 10.7
  Component Side w0.203: v1(55.217,32.537) 55.813,31.941 U1.10 ; R4.1 58.867,31.224 ; R2.2 58.867,31.224 ; v1(60.817,31.237) 58.879,31.237 58.867,31.224
  Solder Side w0.25: v1(55.217,32.537) 56.517,31.237 v1(60.817,31.237)
NetD1_1: D1.1 R2.1 | length 1.2
  Component Side w0.203: R2.1 D1.1
NetD1_2: D1.2 U1.8 | length 3.2
  Component Side w0.203: U1.8 56.613,31.841 57.784,33.012 D1.2
NetD2_1: D2.1 R4.2 | length 1.3
  Component Side w0.203: D2.1 R4.2
NetD2_2: D2.2 U1.5 | length 1.5
  Component Side w0.203: U1.5 57.471,29.262 D2.2
NetJ1_1: J1.1 J2.4 | length 2.7
  Component Side w0.203: J1.1@37.617,27.362 40.257,27.362 J2.4@40.265,27.354
NetJ2_6: J2.6 U1.9 | length 13.9
  Component Side w0.203: J2.6 46.24,31.185 48.01,31.185 50.012,33.187 55.442,33.187 56.213,32.416 U1.9
NetJ4_2: J4.2 U4.11 | length 25.5
  Component Side w0.203: U4.11 U4.11@41.842,41.705
  Component Side w0.25: J4.2 20.822,41.705 U4.11
NetR1_1: R1.1 U1.2 | length 3.4
  Component Side w0.203: R1.1 55.148,27.631 55.148,28.15 55.708,28.71 56.103,28.71 56.213,28.821 U1.2
NetR3_1: R3.1 U1.4 | length 3.3
  Component Side w0.203: U1.4 57.013,28.816 57.11,28.718 57.385,28.718 57.917,28.187 57.917,27.537 R3.1
NetR5_1: R5.1 U2.G7 | length 1.5
  Component Side w0.203: U2.G7 47.504,24.391 R5.1
NetR7_1: R7.1 U2.A2 | length 2.5
  Component Side w0.203: R7.1 37.783,16.559 U2.A2
NetR12_2: R12.2 U6.7 | length 1.5
  Component Side w0.15: U6.7 R12.2
PGND: P2.0 P2.6 P2.10 P3.4 P3.5 P3.11 P3.12 | length 18.5
  Solder Side w0.203: v2(71.848,41) v2@71.933,41.085 ; P3.12 75.098,30.84 v2(75.098,28.225) ; P3.11 78.873,30.875 v2(78.873,28.2)
  Solder Side w0.34: v2(77.523,22.4) 78.629,22.4 79.743,21.286 79.743,19.721 79.568,19.545 79.568,19.5 P2.6@79.128,19.5
  Solder Side w0.5: v2@71.933,41.085 P3.4 76.348,39.75 77.618,39.75 P3.5
  other v2: 79.934,14.554
TCK: P2.1 P3.2 | length 38.1
  Solder Side w0.34: P3.2 71.848,43.625 69.923,41.7 69.923,19.875 72.798,17 P2.1@79.128,17
TDI: P2.2 P3.6 | length 31.9
  Solder Side w0.203: P2.2@79.128,17.5 P2.2@79.148,17.48
  Solder Side w0.34: P3.6 71.368,38.545 70.648,37.825 70.648,20.2 73.348,17.5 P2.2@79.128,17.5
TDO: P2.5 P3.9 | length 38.9
  Solder Side w0.34: P3.9 80.488,33.465 80.873,33.85 80.873,36.8 80.448,37.225 72.248,37.225 71.448,36.425 71.448,21.2 73.638,19.01 79.118,19.01 P2.5@79.128,19
TMS: P2.3 P3.3 | length 26.7
  Solder Side w0.34: P3.3 80.588,41.085 81.373,40.3 81.373,24.562 80.723,23.912 80.723,18.612 80.112,18 P2.3@79.128,18
TRST: P2.8 P3.8 | length 24.2
  Solder Side w0.34: P3.8 72.928,36.005 72.223,35.3 72.223,21.575 73.298,20.5 P2.8@79.128,20.5
VBATT: J2.3 U3.16 U3.18 U5.16 U5.18 | length 77.1
  Component Side w0.203: U5.16 12.481,22.226 12.692,22.437 12.692,22.987 12.453,23.226 U5.18 ; U3.16 12.521,40.641 12.642,40.762 12.642,41.512 12.513,41.641 U3.18
  Solder Side w0.203: 39.339,31.185 40.354,31.185 41.148,30.391 41.148,29.3
  Solder Side w0.25: v1(13.267,41.187) 14.942,42.862 26.944,42.862 38.639,31.167 39.339,31.167 ; v1(13.317,22.787) 37.842,22.787 J2.3 41.142,28.627 41.142,29.3
VCC: C9.2 C11.2 J3.2 U4.10 U4.16 U6.4 U6.8 | length 14.9
  Component Side w0.203: C11.2 15.723,32.225 C9.2 ; 17.923,30.275 18.308,30.66 U6.8 ; U4.10@41.08,42.987 U4.10
  Component Side w0.25: C11.2 15.073,31.081 15.879,30.275 17.923,30.275 20.723,30.275 20.908,30.46 U6.4
  Component Side w0.7: v1(38.992,42.987) U4.10@41.08,42.987 ; v1(38.999,35.355) U4.16
  other v1: 14.097,31.902
VCC_BATT33: J3.3 U3.13 U5.13 | length 54.3
  Component Side w0.25: U3.13 8.026,39.141 7.341,38.456 7.341,21.615 8.23,20.726 U5.13 12.824,20.726 15.869,23.771 15.869,26.465 16.572,27.168 23.675,27.168 26.168,24.675 26.168,15.543 26.186,15.525 J3.3
VCC_DC5: C3.2 J1.2 R6.2 U2.A6 U2.A7 U2.B6 U2.B7 U2.C6 U2.C7
  other v1: 39.884,22.274 41.154,22.274 42.424,22.274
VCC_DC33: C5.2 C7.1 J3.1 U2.A1 U2.B1 U2.C1 U2.C2 | length 3.8
  Component Side w0.203: J3.1@31.248,15.543 31.259,15.532 C5.2
  other v1: 40.519,15.289 41.789,15.289 43.059,15.289 43.059,16.559
VJTAG: P2.9 P3.7 | length 25.6
  Solder Side w0.34: P3.7 77.618,34.8 73.423,34.8 72.998,34.375 72.998,21.75 73.748,21 P2.9@79.128,21
VPUMP: P2.4 P3.10 | length 18.4
  Solder Side w0.3: 76.683,32.487 76.928,32.241 76.928,29.108
  Solder Side w0.34: P3.10 75.704,33.465 76.683,32.487 ; 76.928,29.108 76.928,26.695 80.233,23.39 80.233,18.835 79.898,18.5 P2.4@79.128,18.5
VUSB_5: C1.2 C2.2 P4.3 P4.4 U1.1 U2.F3 U2.G1 U2.G2 U2.H1 U2.H2 | length 1.8
  Component Side w0.203: U2.F3 U2.G2
  other v1: 50.448,11.95 53.473,16.3 50.198,16.375
VUSB_33: AND1.5 C8.2 P4.1 U4.1 U4.7 | length 57.3
  Component Side w0.203: U4.1 48.578,35.355 AND1.5
  Component Side w0.25: U4.1 45.091,35.355 44.329,36.117 44.329,42.34 44.964,42.975 U4.7 48.709,42.975 C8.2 49.958,42.91 v1(50.148,43.1)
  Solder Side w0.25: P4.1 18.33,48.875 45.523,48.875 46.148,48.25 46.148,47.1 v1(50.148,43.1)
pads on no net: P2.7 P3.1 P4.2 P4.7 P4.8 P4.9 P4.10 P4.11 P4.12 P4.13 P4.14 P4.15 P4.16 P4.18 P4.19 P4.20 P4.21 P4.22 P4.23 P4.24 P4.25 P4.26 P4.28 P4.30 P4.32 P4.34 P4.35 P4.36 P4.39 P4.40 P5.1 P5.2 P5.3 P5.4 P5.5 P5.6 P5.7 P5.8 P5.9 P5.10 P5.12 P5.14 P5.16 P5.17 P5.18 P5.19 P5.20 P5.21 P5.22 P5.23 P5.24 P5.26 P5.27 P5.28 P5.30 P5.31 P5.32 P5.33 P5.34 P5.35 P5.36 P5.37 P5.38 U1.6 U1.7 U3.14 U3.19 U5.14 U5.19 U6.13 U6.14

## Polygon pours and split planes (outlines as drawn)
PGND on Ground Plane (split plane): 81.786,12.577 70.477,12.577 68.225,14.829 68.225,43.971 70.002,45.748 81.786,45.748
GND on Ground Plane (split plane): 79.955,55.506 80.152,55.477 80.346,55.428 80.534,55.361 80.714,55.276 80.885,55.173 81.045,55.055 81.193,54.921 81.327,54.773 81.445,54.613 81.548,54.442 81.633,54.262 81.7,54.074 81.749,53.88 81.778,53.683 81.787,53.5 81.786,53.484 81.786,46.252 69.898,46.252 69.833,46.244 69.772,46.218 69.742,46.196 69.72,46.178 67.795,44.253 67.755,44.201 67.729,44.14 67.721,44.075 67.721,14.725 67.729,14.66 67.755,14.599 67.795,14.547 70.195,12.147 70.247,12.107 70.308,12.081 70.373,12.073 81.786,12.073 81.786,2.526 81.787,2.51 81.778,2.327 81.749,2.13 81.7,1.936 81.633,1.748 81.548,1.568 81.445,1.397 81.327,1.237 81.193,1.089 81.045,0.955 80.885,0.837 80.714,0.734 80.534,0.649 80.346,0.582 80.152,0.533 79.955,0.504 79.772,0.495 79.756,0.496 15.225,0.496 15.225,9.998 43.723,9.998 43.788,10.006 43.849,10.032 43.901,10.072 43.941,10.124 43.967,10.185 43.975,10.25 43.967,10.315 43.948,10.36 43.948,45.775 43.94,45.84 43.914,45.901 43.874,45.953 43.822,45.993 43.761,46.019 43.696,46.027 15.25,46.027 15.25,55.514 79.756,55.514 79.772,55.515
IGND on Ground Plane (split plane): 2.54,55.514 14.746,55.514 14.746,45.775 14.754,45.71 14.78,45.649 14.82,45.597 14.872,45.557 14.933,45.531 14.998,45.523 43.444,45.523 43.444,10.502 14.973,10.502 14.908,10.494 14.847,10.468 14.795,10.428 14.755,10.376 14.729,10.315 14.721,10.25 14.721,0.496 2.54,0.496 2.524,0.495 2.341,0.504 2.144,0.533 1.95,0.582 1.762,0.649 1.582,0.734 1.411,0.837 1.251,0.955 1.103,1.089 0.969,1.237 0.851,1.397 0.748,1.568 0.663,1.748 0.596,1.936 0.547,2.13 0.518,2.327 0.509,2.51 0.51,2.526 0.51,53.484 0.509,53.5 0.518,53.683 0.547,53.88 0.596,54.074 0.663,54.262 0.748,54.442 0.851,54.613 0.969,54.773 1.103,54.921 1.251,55.055 1.411,55.173 1.582,55.276 1.762,55.361 1.95,55.428 2.144,55.477 2.341,55.506 2.524,55.515
PGND on Power Plane (split plane): 81.786,12.577 70.477,12.577 68.225,14.829 68.225,43.971 70.002,45.748 81.786,45.748
VUSB_5 on Power Plane (split plane): 79.955,55.506 80.152,55.477 80.346,55.428 80.534,55.361 80.714,55.276 80.885,55.173 81.045,55.055 81.193,54.921 81.327,54.773 81.445,54.613 81.548,54.442 81.633,54.262 81.7,54.074 81.749,53.88 81.778,53.683 81.787,53.5 81.786,53.484 81.786,46.252 69.898,46.252 69.833,46.244 69.772,46.218 69.742,46.196 69.72,46.178 67.795,44.253 67.755,44.201 67.729,44.14 67.721,44.075 67.721,14.725 67.729,14.66 67.755,14.599 67.795,14.547 70.195,12.147 70.247,12.107 70.308,12.081 70.373,12.073 81.786,12.073 81.786,2.526 81.787,2.51 81.778,2.327 81.749,2.13 81.7,1.936 81.633,1.748 81.548,1.568 81.445,1.397 81.327,1.237 81.193,1.089 81.045,0.955 80.885,0.837 80.714,0.734 80.534,0.649 80.346,0.582 80.152,0.533 79.955,0.504 79.772,0.495 79.756,0.496 15.225,0.496 15.225,9.998 43.698,9.998 43.763,10.006 43.824,10.032 43.876,10.072 43.916,10.124 43.942,10.185 43.95,10.25 43.95,45.775 43.942,45.84 43.916,45.901 43.876,45.953 43.824,45.993 43.763,46.019 43.698,46.027 15.25,46.027 15.25,55.514 79.756,55.514 79.772,55.515
VCC on Power Plane (split plane): 2.54,55.514 14.746,55.514 14.746,45.775 14.754,45.71 14.78,45.649 14.82,45.597 14.872,45.557 14.933,45.531 14.998,45.523 43.446,45.523 43.446,10.502 14.973,10.502 14.908,10.494 14.847,10.468 14.795,10.428 14.755,10.376 14.729,10.315 14.721,10.25 14.721,0.496 2.54,0.496 2.524,0.495 2.341,0.504 2.144,0.533 1.95,0.582 1.762,0.649 1.582,0.734 1.411,0.837 1.251,0.955 1.103,1.089 0.969,1.237 0.851,1.397 0.748,1.568 0.663,1.748 0.596,1.936 0.547,2.13 0.518,2.327 0.509,2.51 0.51,2.526 0.51,53.484 0.509,53.5 0.518,53.683 0.547,53.88 0.596,54.074 0.663,54.262 0.748,54.442 0.851,54.613 0.969,54.773 1.103,54.921 1.251,55.055 1.411,55.173 1.582,55.276 1.762,55.361 1.95,55.428 2.144,55.477 2.341,55.506 2.524,55.515

## Other copper
Component Side:
  rectangle net GND: 56.498,28.9 56.748,29.9
  rectangle net BATT_TH: 38.798,28.7 43.373,31.025
  region net VUSB_5: 52.838,17.194 46.615,17.194 46.615,11.225 52.838,11.225
  region net IGND: 43.44,20.925 32.518,20.925 32.518,17.321 43.44,17.321
  region net VCC_DC5: 43.44,24.814 32.518,24.814 32.518,21.2 43.44,21.2
  region net VCC_DC5: 36.242,28.662 32.517,28.662 32.517,24.212 36.242,24.212
  region net VBATT: 13.717,23.337 12.342,23.337 12.342,22.112 13.717,22.112
  region net VBATT: 13.817,41.762 12.448,41.762 12.448,40.537 13.817,40.537
  region net IGND: 14.798,32.75 14.798,35.45 15.148,35.8 15.748,35.8 16.598,34.95 16.598,33.675 15.898,33.675 15.348,33.125 15.348,32.75
  region net GND: 55.598,27.55 55.598,28.025 55.773,28.025 56.498,28.75 56.498,29 56.748,29 56.748,28.725 57.348,28.125 57.548,28.125 57.548,27.55
  region net GND: 46.107,11.225 46.107,16.813 45.599,17.321 45.599,18.083 45.98,18.464 51.187,18.464 51.441,18.21 52.838,18.21 52.838,19.226 51.314,19.226 50.806,19.734 48.393,19.734 48.139,19.988 48.139,22.147 48.393,22.401 50.933,22.401 51.441,22.909 52.838,22.909 52.838,23.671 48.139,23.671 48.139,22.655 47.885,22.401 47.123,22.401 46.869,22.655 46.869,24.814 43.948,24.814 43.948,11.225
  region net VCC_DC33: 41.789,17.067 43.44,17.067 43.44,11.225 30.531,11.225 30.531,16.178 35.82,16.178 36.836,15.162 38.868,15.162 39.376,15.67 41.281,15.67 41.789,16.178
  region net GND: 57.403,29.862 54.99,29.862 54.482,29.354 53.466,29.354 53.466,31.259 54.609,31.259 54.99,30.878 57.403,30.878
  region net VUSB_5: 55.942,28.962 55.342,28.962 54.417,28.037 53.517,28.037 53.517,28.762 54.392,28.762 55.317,29.687 55.942,29.687
  region net NetC10_1: 55.917,31.062 55.217,31.062 54.417,31.862 53.517,31.862 53.517,32.562 54.417,32.562 55.217,31.762 55.917,31.762
  region net VUSB_5: 53.517,28.762 53.517,17.887 52.367,16.737 52.367,11.212 52.825,11.212 52.838,11.225 52.851,11.212 53.417,11.212 54.417,12.212 54.417,28.737 54.392,28.762
  region net NetC10_1: 53.517,31.862 52.792,31.137 52.792,25.987 52.042,25.237 44.442,25.237 43.942,25.737 43.942,28.212 44.367,28.637 48.567,28.637 52.492,32.562 53.517,32.562
  region net IGND: 12.167,38.787 8.492,38.787 8.142,38.437 8.142,33.687 8.367,33.462 12.192,33.462 12.192,34.287 9.242,34.287 9.117,34.412 9.117,34.887 9.217,34.987 12.167,34.987 12.167,35.812 9.217,35.812 9.092,35.937 9.092,36.337 9.242,36.487 12.167,36.487 12.167,37.312 9.242,37.312 9.117,37.437 9.117,37.837 9.267,37.987 12.167,37.987
  region net GND: 45.223,43.9 50.473,43.9 50.698,44.125 50.698,44.5 50.498,44.7 45.323,44.7 45.223,44.6
  region net VCC: 14.823,32.475 16.623,32.475 16.623,30.275 15.873,30.275 14.823,31.325 13.673,31.325 13.673,32.475
Solder Side:
  rectangle net PGND: 70.998,40.45 73.973,41.7
  rectangle net PGND: 73.423,27.5 76.429,31.55
  rectangle net PGND: 77.47,27.375 80.423,31.575
  rectangle net PGND: 76.623,21.35 79.423,23.275
  rectangle net PGND: 79.07,13.818 81.94,16.205
  rectangle net PGND: 81.153,15.875 81.94,22.708
Ground Plane (plane layer: these items are gaps in the copper):
  lines w0.5: 14.973,0.036 14.973,10.25 43.723,10.25 ; 14.998,55.974 14.998,45.775 43.696,45.775 43.696,10.25 ; 82.246,12.325 70.373,12.325 67.973,14.725 67.973,44.075 69.898,46 82.298,46
Power Plane (plane layer: these items are gaps in the copper):
  lines w0.5: 14.973,0 14.973,10.25 43.698,10.25 43.698,45.775 14.998,45.775 14.998,55.999 ; 82.246,12.325 70.373,12.325 67.973,14.725 67.973,44.075 69.898,46 82.298,46

## Silkscreen, mask and mechanical layers (free items; w line width, h text height)
Top Overlay:
  lines w0.2: 14.973,0 14.973,10.15 15.023,10.2 43.623,10.2 43.623,45.775 14.998,45.775 14.998,56.1
  text "Single_Ch_MB, Song & Ian, 27/05/2015" at 24.613,53.416 h1
  text "ISO" at 14.373,52.575 h0.8 r90
  text "9" at 49.748,32.075 h0.8
  text "5" at 49.798,29.425 h0.8
  text "1" at 49.948,26.725 h0.8
  text "ISO" at 14.348,0.85 h0.8 r90
Bottom Overlay:
  lines w0.2: 14.996,56.073 14.996,45.775 43.623,45.775 43.623,10.25 15.011,10.25 15.011,0.076 ; 43.637,25.675 43.637,33.739 43.823,33.925 49.173,33.925 49.173,25.675 43.637,25.675
  lines w0.5: 82.246,12.325 70.373,12.325 67.973,14.725 67.973,44.075 69.898,46 82.298,46
  text "ISO" at 13.248,52.675 h0.8 r270
  text "GND" at 22.398,52.45 h0.8 r90
  text "VBUS" at 19.888,52.349 h0.8 r90
  text "MISO" at 63.123,52.325 h0.8 r90
  text "V3P3" at 14.148,45.75 h0.8 r90
  text "CS" at 53.048,43.6 h0.8 r90
  text "GND" at 22.598,42.75 h0.8 r90
  text "GND" at 58.223,42.741 h0.8 r90
  text "GND" at 63.348,42.741 h0.8 r90
  text "MOSI" at 37.898,42.208 h0.8 r90
  text "VBUS" at 20.244,42.012 h0.8 r90
  text "SCK" at 55.998,42.008 h0.8 r90
  text "ADDR1" at 48.123,41.408 h0.8 r90
  text "ADDR4" at 40.423,41.142 h0.8 r90
  text "ADDR3" at 42.923,41.142 h0.8 r90
  text "ADDR2" at 45.548,41.142 h0.8 r90
  text "ADDR0" at 50.748,41.142 h0.8 r90
  text "MISO_D >" at 25.673,40.75 h0.8
  text "1" at 15.173,40.675 h0.8
  text "1. Everything on DC/DC / J1 On, J2 out Box, J3 (1,2) /  / 2. Everything on Battery / J1 Off, J2 in Box, J3 (2,3) /  / 3. This board on DC/DC ONLY / J1 Off, J2 in Box, J3 (1,2) /  / 4. Charge Battery / J1 N/A, J2 across, J3 (2,3)" at 67.183,38.43 h0.8 r90
  text "MISO_S >" at 25.598,35.525 h0.8
  text "3" at 15.116,33.857 h0.8
  text "9" at 50.331,32.075 h0.8
  text "5" at 50.281,29.425 h0.8
  text "< DC5" at 33.198,26.975 h0.8
  text "1" at 50.131,26.725 h0.8
  text "J2" at 48.598,24.325 h0.8
  text "LCPR Adapter" at 69.948,23.975 h1 r90
  text "< BATT" at 25.798,17.325 h0.8 r270
  text "< DC3.3" at 30.848,17.325 h0.8 r270
  text "1" at 31.448,13 h0.8
  text "3" at 26.441,12.979 h0.8
  text "GND" at 69.098,7.525 h0.8 r90
  text "GND" at 69.073,4.15 h0.8 r90
  text "GND" at 32.923,1.375 h0.8 r90
  text "GND" at 30.298,1.35 h0.8 r90
  text "GND" at 35.323,1.35 h0.8 r90
  text "GND" at 48.073,1 h0.8 r90
  text "GND" at 53.098,0.975 h0.8 r90
  text "ISO" at 13.073,0.95 h0.8 r270
  text "V3P3" at 17.424,0.711 h0.8 r90
Mechanical 2:
  the board outline again, w0.127
Mechanical 30:
  text "610-60012-01 REV07   BOARD OUTLINE" at -15.494,-50.927 h2.54

## Dimensions
0,2.526 to 82.296,2.526 on Mechanical 1
79.756,-0.014 to 79.756,56.024 on Mechanical 1

## Text inside footprints (layer, text, board x,y; h text height)
P4: Bottom Overlay "40" at 65.823,52.425 h1; Bottom Overlay "2" at 17.198,52.575 h1; Bottom Overlay "39" at 65.811,44.348 h1; Mechanical 32 "8" at 24.384,50.103 h0.64 r180; Mechanical 32 "10" at 26.67,50.103 h0.64 r180; Mechanical 32 "12" at 29.21,50.103 h0.64 r180; Mechanical 32 "14" at 31.75,50.103 h0.64 r180; Mechanical 32 "16" at 34.29,50.103 h0.64 r180; Mechanical 32 "18" at 36.83,50.103 h0.64 r180; Mechanical 32 "20" at 39.37,50.103 h0.64 r180; Mechanical 32 "22" at 41.91,50.103 h0.64 r180; Mechanical 32 "24" at 44.45,50.103 h0.64 r180; Mechanical 32 "26" at 46.99,50.103 h0.64 r180; Mechanical 32 "28" at 49.53,50.103 h0.64 r180; Mechanical 32 "30" at 52.07,50.103 h0.64 r180; Mechanical 32 "32" at 54.61,50.103 h0.64 r180; Mechanical 32 "34" at 57.15,50.103 h0.64 r180; Mechanical 32 "36" at 59.69,50.103 h0.64 r180; Mechanical 32 "38" at 62.23,50.103 h0.64 r180; Mechanical 32 "2" at 16.764,50.103 h0.64 r180; Mechanical 32 "40" at 64.77,50.103 h0.64 r180; Mechanical 32 "39" at 64.77,47.563 h0.64 r180; Mechanical 32 "23" at 44.45,47.563 h0.64 r180; Mechanical 32 "4" at 19.304,50.103 h0.64 r180; Mechanical 32 "3" at 19.304,47.563 h0.64 r180; Mechanical 32 "31" at 54.61,47.563 h0.64 r180; Mechanical 32 "29" at 52.07,47.563 h0.64 r180; Mechanical 32 "27" at 49.53,47.563 h0.64 r180; Mechanical 32 "25" at 46.99,47.563 h0.64 r180; Mechanical 32 "21" at 41.91,47.563 h0.64 r180; Mechanical 32 "35" at 59.69,47.563 h0.64 r180; Mechanical 32 "7" at 24.384,47.563 h0.64 r180; Mechanical 32 "19" at 39.37,47.563 h0.64 r180; Mechanical 32 "17" at 36.83,47.563 h0.64 r180; Mechanical 32 "15" at 34.29,47.563 h0.64 r180; Mechanical 32 "13" at 31.75,47.563 h0.64 r180; Mechanical 32 "11" at 29.21,47.563 h0.64 r180; Mechanical 32 "9" at 26.924,47.563 h0.64 r180; Mechanical 32 "1" at 16.764,47.563 h0.64 r180; Mechanical 32 "37" at 62.23,47.563 h0.64 r180; Mechanical 32 "33" at 57.15,47.563 h0.64 r180; Mechanical 32 "6" at 21.844,50.103 h0.64 r180; Mechanical 32 "5" at 21.844,47.563 h0.64 r180; Mechanical 32 "39" at 69.175,47.733 h0.71; Mechanical 32 "2" at 14.58,49.708 h0.71; Mechanical 32 "40" at 69.221,49.747 h0.71
P5: Bottom Overlay "40" at 66.345,10.693 h1; Bottom Overlay "2" at 17.374,10.668 h1; Bottom Overlay "39" at 66.123,2.625 h1; Mechanical 32 "5" at 21.844,5.907 h0.64 r180; Mechanical 32 "14" at 31.75,8.447 h0.64 r180; Mechanical 32 "4" at 19.304,8.447 h0.64 r180; Mechanical 32 "35" at 59.69,5.907 h0.64 r180; Mechanical 32 "36" at 59.69,8.447 h0.64 r180; Mechanical 32 "38" at 62.23,8.447 h0.64 r180; Mechanical 32 "19" at 39.37,5.907 h0.64 r180; Mechanical 32 "21" at 41.91,5.907 h0.64 r180; Mechanical 32 "23" at 44.45,5.907 h0.64 r180; Mechanical 32 "27" at 49.53,5.907 h0.64 r180; Mechanical 32 "6" at 21.844,8.447 h0.64 r180; Mechanical 32 "8" at 24.384,8.447 h0.64 r180; Mechanical 32 "10" at 26.67,8.447 h0.64 r180; Mechanical 32 "12" at 29.21,8.447 h0.64 r180; Mechanical 32 "2" at 16.764,8.447 h0.64 r180; Mechanical 32 "16" at 34.29,8.447 h0.64 r180; Mechanical 32 "18" at 36.83,8.447 h0.64 r180; Mechanical 32 "20" at 39.37,8.447 h0.64 r180; Mechanical 32 "22" at 41.91,8.447 h0.64 r180; Mechanical 32 "24" at 44.45,8.447 h0.64 r180; Mechanical 32 "26" at 46.99,8.447 h0.64 r180; Mechanical 32 "28" at 49.53,8.447 h0.64 r180; Mechanical 32 "30" at 52.07,8.447 h0.64 r180; Mechanical 32 "32" at 54.61,8.447 h0.64 r180; Mechanical 32 "34" at 57.15,8.447 h0.64 r180; Mechanical 32 "11" at 29.21,5.907 h0.64 r180; Mechanical 32 "9" at 26.924,5.907 h0.64 r180; Mechanical 32 "3" at 19.304,5.907 h0.64 r180; Mechanical 32 "7" at 24.384,5.907 h0.64 r180; Mechanical 32 "37" at 62.23,5.907 h0.64 r180; Mechanical 32 "33" at 57.15,5.907 h0.64 r180; Mechanical 32 "31" at 54.61,5.907 h0.64 r180; Mechanical 32 "1" at 16.764,5.907 h0.64 r180; Mechanical 32 "40" at 64.77,8.447 h0.64 r180; Mechanical 32 "39" at 64.77,5.907 h0.64 r180; Mechanical 32 "29" at 52.07,5.907 h0.64 r180; Mechanical 32 "25" at 46.99,5.907 h0.64 r180; Mechanical 32 "17" at 36.83,5.907 h0.64 r180; Mechanical 32 "15" at 34.29,5.907 h0.64 r180; Mechanical 32 "13" at 31.75,5.907 h0.64 r180; Mechanical 32 "39" at 69.258,5.551 h0.71; Mechanical 32 "2" at 14.656,8.001 h0.71; Mechanical 32 "40" at 69.233,8.142 h0.71